# EAGLE board Teensy 3.1 CAN + MicroSD shield v0 (EAGLE 6.5.0)
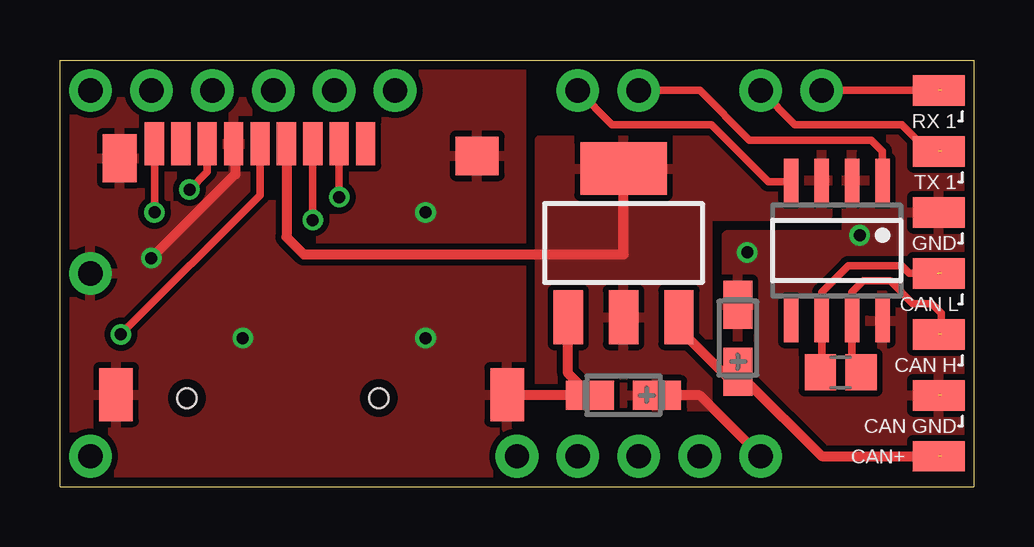
[diagram p0: board, top side]
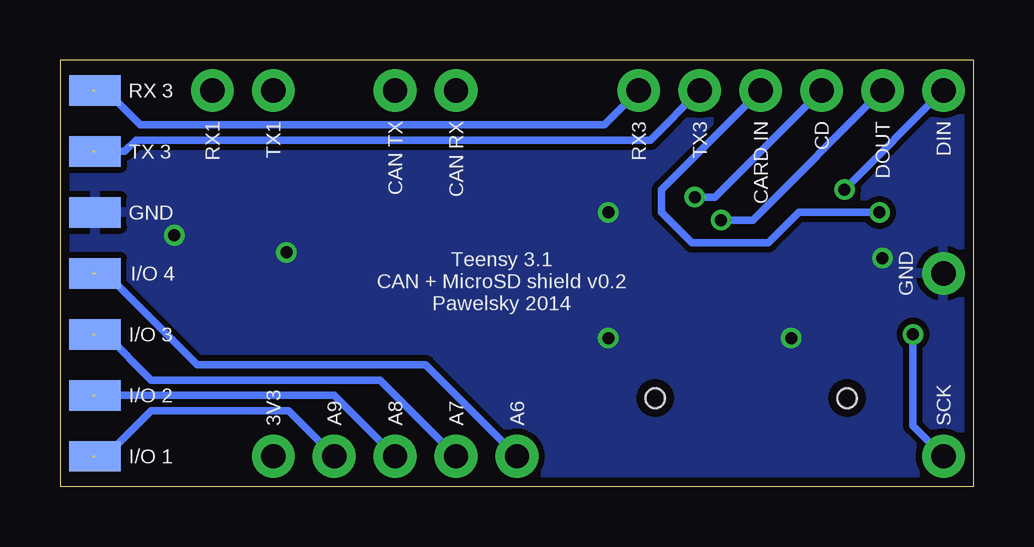
[diagram p1: board, bottom side, seen from below]

Size 38.1 x 17.78 mm. Coordinates in mm from the lower left corner, seen from the top.
Outline: 38.1,17.78 38.1,0 0,0 0,17.78 38.1,17.78
Copper layers (1*16): Top 0.0356mm / dielectric 1.5011mm / Bottom 0.0356mm
Design rules "PawelskyPCBRules": minimum track width 10mil, minimum drill 13mil, track to track 10mil, track to pad 10mil, pad to pad 10mil, via to via 10mil, smd to smd 10mil, copper to edge 15mil, drill to drill 10mil, minimum pad ring 7mil, minimum via ring 7mil, stop-mask expansion 3mil, vias tented up to drill 30mil, thermal gap 10mil
Net classes: 0 default: clearance 0.205 mm

## Footprints (pad centres in the part's own frame; a part is rotated, then mirrored left to right if it is on the bottom)
1X01-CLEANBIG = drill 1.016 pad 1.778: 1 0,0
CT3216 = smd 2 x 1.2: + -1.4,0; - 1.4,0
1X01-SMT = smd 2.159 x 1.27: 1 -0.191,0
SO08 = smd 0.6 x 1.8: 1 -1.905,-2.917; 2 -0.635,-2.917; 3 0.635,-2.917; 4 1.905,-2.917; 5 1.905,2.917; 6 0.635,2.917; 7 -0.635,2.917; 8 -1.905,2.917
SOT223 = smd 1.219 x 2.235: 1 -2.311,-3.099; 2 0,-3.099; 3 2.311,-3.099 | smd 3.6 x 2.2: 4 0,3.099
R0805 = smd 1.3 x 1.5: 1 -0.85,0; 2 0.85,0
MICROSD_PP = smd 1.8 x 0.8: 1 0,3.85; 2 0,2.75; 3 0,1.65; 4 0,0.55; 5 0,-0.55; 6 0,-1.65; 7 0,-2.75; 8 0,-3.85; 9 0,-4.95 | smd 1.6 x 1.8: GND@1 0.5,8.5 | smd 2.2 x 1.4: GND@2 10.45,9.75; GND@4 10.45,-6.55 | smd 2 x 1.4: GND@3 0.6,-6.4 | hole 0.8: 10.6,4.4; 10.6,-3.6

## Placement (x,y rotation side)
3V3  3V3  [1X01-CLEANBIG]  29.21,1.27 0 top
A6  A6  [1X01-CLEANBIG]  19.05,1.27 0 top
A7  A7  [1X01-CLEANBIG]  21.59,1.27 0 top
A8  A8  [1X01-CLEANBIG]  24.13,1.27 0 top
A9  A9  [1X01-CLEANBIG]  26.67,1.27 0 top
C1  10uF  [CT3216]  28.26,6.19 90 top
C2  10uF  [CT3216]  23.5,3.81 180 top
CAN+  CAN+  [1X01-SMT]  36.83,1.27 0 top
CANH  CAN H  [1X01-SMT]  36.83,6.35 0 top
CANL  CAN L  [1X01-SMT]  36.83,8.89 0 top
CANRX  CAN RX  [1X01-CLEANBIG]  21.59,16.51 0 top
CANTX  CAN TX  [1X01-CLEANBIG]  24.13,16.51 0 top
CARD_IN  CARD IN  [1X01-CLEANBIG]  8.89,16.51 0 top
CD  CD  [1X01-CLEANBIG]  6.35,16.51 0 top
DA1  SN65HVD232  [SO08]  32.38,9.84 180 top
DA2  LM1117IMP-3.3  [SOT223]  23.5,10.16 0 top
DIN  DIN  [1X01-CLEANBIG]  1.27,16.51 0 top
DOUT  DOUT  [1X01-CLEANBIG]  3.81,16.51 0 top
GND  GND  [1X01-CLEANBIG]  1.27,8.89 0 top
GND@2  CAN GND ^  [1X01-SMT]  36.83,3.81 0 top
GND@3  GND 3  [1X01-SMT]  36.83,11.43 180 bottom
GND@4  GND 1  [1X01-SMT]  36.83,11.43 0 top
IO1  I/O 1  [1X01-SMT]  36.83,1.27 180 bottom
IO2  I/O 2  [1X01-SMT]  36.83,3.81 180 bottom
IO3  I/O 3  [1X01-SMT]  36.83,6.35 180 bottom
IO4  I/O 4  [1X01-SMT]  36.83,8.89 180 bottom
R1  120ohm  [R0805]  32.54,4.76 180 top
RX1  RX1  [1X01-CLEANBIG]  31.75,16.51 0 top
RX1H  RX 1  [1X01-SMT]  36.83,16.51 0 top
RX3  RX3  [1X01-CLEANBIG]  13.97,16.51 0 top
RX3H  RX 3  [1X01-SMT]  36.83,16.51 180 bottom
SCK  SCK  [1X01-CLEANBIG]  1.27,1.27 0 top
TX1  TX1  [1X01-CLEANBIG]  29.21,16.51 0 top
TX1H  TX 1  [1X01-SMT]  36.83,13.97 0 top
TX3  TX3  [1X01-CLEANBIG]  11.43,16.51 0 top
TX3H  TX 3  [1X01-SMT]  36.83,13.97 180 bottom
U$1  MICROSD_PP  [MICROSD_PP]  8.89,14.29 270 top

## Library data of the parts
3V3 A6-A9 CANRX CANTX CARD_IN CD DIN DOUT GND RX1 RX3 SCK TX1 TX3 = adafruit
C1 C2 = rcl
CAN+ = adafruit; CANVCC: CAN+
CANH = adafruit; CANH: CAN H
CANL = adafruit; CANL: CAN L
DA1 = transceiver
DA2 = vreg
GND@2 = adafruit; GND: CAN GND
GND@3 GND@4 = adafruit; GND: GND
IO1 = adafruit; IO1: I/O 1
IO2 = adafruit; IO2: I/O 2
IO3 = adafruit; IO3: I/O 3
IO4 = adafruit; IO4: I/O 4
R1 = resistor
RX1H = adafruit; RX1: RX 1
RX3H = adafruit; RX3: RX 3
TX1H = adafruit; TX1: TX 1
TX3H = adafruit; TX3: TX 3
U$1 = DE1594-v2

## Nets
3V3: 3V3.1 C2.+ DA1.3 DA2.2 DA2.4 U$1.4
CAN+: C1.+ CAN+.1 DA2.3
CANH: CANH.1 DA1.7 R1.1
CANL: CANL.1 DA1.6 R1.2
CANRX: CANRX.1 DA1.4
CANTX: CANTX.1 DA1.1
CARD_IN: CARD_IN.1 U$1.9
CS: CD.1 U$1.2
GND: C1.- C2.- DA1.2 DA1.8 DA2.1 GND.1 GND@2.1 GND@3.1 GND@4.1 U$1.6 U$1.GND@1 U$1.GND@2 U$1.GND@3 U$1.GND@4
MISO: DIN.1 U$1.7
MOSI: DOUT.1 U$1.3
N$8: TX3.1 TX3H.1
N$9: TX1.1 TX1H.1
N$10: RX3.1 RX3H.1
N$11: RX1.1 RX1H.1
N$12: A9.1 IO1.1
N$13: A8.1 IO2.1
N$14: A7.1 IO3.1
N$15: A6.1 IO4.1
SCK: SCK.1 U$1.5

## Tracks (layer width: path | path; a pad name or v marks a point on that pad's centre or on a via)
3V3
  Top 0.406: 3V3.1 26.67,3.81 C2.+ | DA2.4 23.5,9.68 10.16,9.68 9.44,10.4 U$1.4
  pour Top: 20,14.45 31.99,14.45 31.99,11.27 26.99,11.27 26.99,3.33 20,3.33
CAN+  (1 unrouted)
  Top 0.406: 36.74,1.27 31.75,1.27 28.57,4.45 C1.+ 27.75,4.63 25.88,6.51 25.88,6.99 DA2.3
CANH  (1 unrouted)
  Top 0.305: R1.1 33.02,4.66 DA1.7 33.02,8.1 33.5,8.57 34.61,8.57 35.56,7.62 36.35,7.62 36.74,7.23 36.74,6.35
CANL  (1 unrouted)
  Top 0.305: R1.2 31.75,4.66 DA1.6 31.75,8.1 32.86,9.21 35.08,9.21 35.4,8.89 36.74,8.89
CANRX
  Top 0.305: 30.48,13.34 DA1.4 30.48,12.7 29.53,12.7 27.15,15.08 23.02,15.08 CANRX.1
CANTX
  Top 0.305: CANTX.1 26.67,16.51 28.73,14.45 33.81,14.45 34.29,13.97 DA1.1
CARD_IN  (via drill 0.5)
  Top 0.305: v3.94,11.43 U$1.9
  Bottom 0.305: CARD_IN.1 13.02,12.38 13.02,11.43 11.75,10.16 8.57,10.16 7.3,11.43 v3.94,11.43
CS  (via drill 0.5)
  Top 0.305: U$1.2 v11.64,12.06
  Bottom 0.305: v11.64,12.06 10.79,12.06 CD.1
GND  (via drill 0.5)
  Top 0.406: U$1.6 7.3,14.22 7.3,13.02 v3.81,9.53 | 18.41,3.81 18.7,3.84 U$1.GND@2 18.67,3.81 C2.- 21.18,4.72 DA2.1
  other vias: 15.24,11.43 15.24,6.19 28.65,9.76 33.34,10.48 7.62,6.19
  pour Bottom (isolate 0.01): 0,17.78 38.1,17.78 38.1,0 0,0
  pour Top (isolate 0.01): 0,17.78 19.21,17.78 19.21,0 0,0
  pour Top: 38.1,17.78 32.78,17.78 32.78,10.48 27.78,10.48 27.78,0 38.1,0
MISO  (via drill 0.5)
  Top 0.305: U$1.7 6.14,13.12 v5.4,12.38
  Bottom 0.305: v5.4,12.38 DIN.1
MOSI  (via drill 0.5)
  Top 0.305: U$1.3 v10.54,11.11
  Bottom 0.305: v10.54,11.11 9.21,11.11 DOUT.1
N$8  (1 unrouted)
  Bottom 0.305: TX3.1 13.49,14.45 34.92,14.45 35.4,13.97 36.74,13.97
N$9
  Top 0.305: TX1.1 30.64,15.08 35.08,15.08 36.2,13.97 TX1H.1
N$10  (1 unrouted)
  Bottom 0.305: RX3.1 15.4,15.08 34.77,15.08 36.2,16.51 36.74,16.51
N$11  (1 unrouted)
  Top 0.305: RX1.1 36.74,16.51
N$12  (1 unrouted)
  Bottom 0.305: A9.1 28.57,3.17 34.29,3.17 36.2,1.27 36.74,1.27
N$13  (1 unrouted)
  Bottom 0.305: A8.1 26.67,3.81 36.74,3.81
N$14  (1 unrouted)
  Bottom 0.305: A7.1 24.77,4.45 34.29,4.45 36.2,6.35 36.74,6.35
N$15  (1 unrouted)
  Bottom 0.305: A6.1 22.86,5.08 32.38,5.08 36.2,8.89 36.58,8.89
SCK  (via drill 0.5)
  Top 0.305: v2.54,6.35 8.34,12.15 U$1.5
  Bottom 0.305: SCK.1 2.54,2.54 v2.54,6.35

## Text on the board
bNames: Teensy 3.1 / CAN + MicroSD shield v0.2 / Pawelsky 2014